# Altium PCB WX0.003.577PCB-4.1.PcbDoc
Units mm, origin at the board's own origin, x right, y up, seen from the top; angles counter-clockwise.
Board outline 120.3 x 240.26 mm, 2 copper layers (Top Layer, Bottom Layer), stack 0.325 mm thick; 29 components, 161 nets, 90 pads, 489 vias.
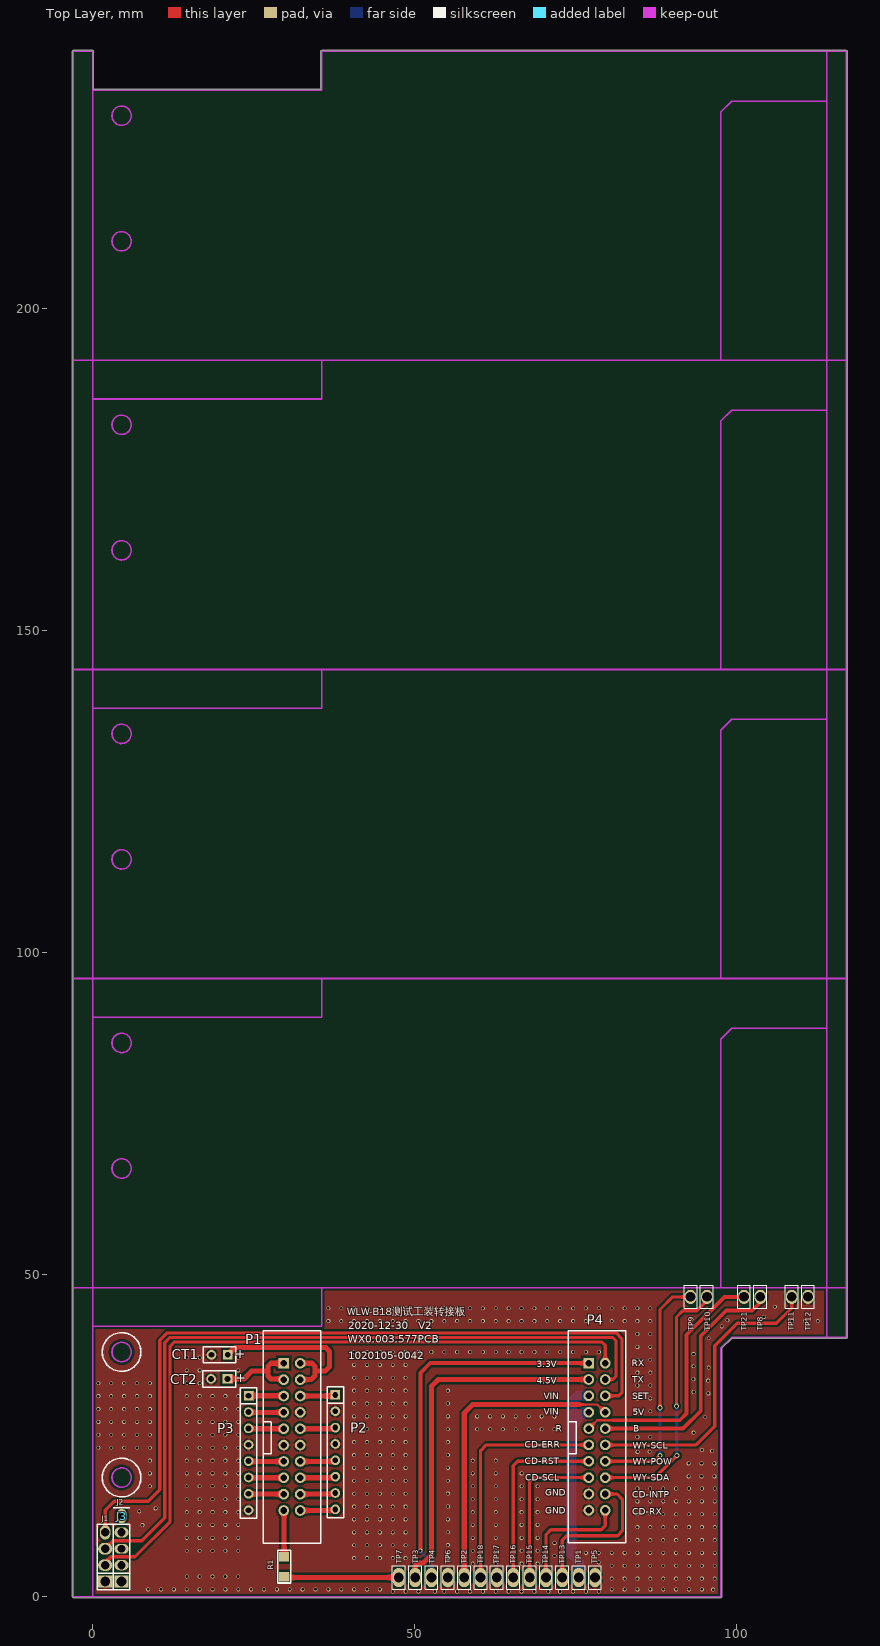
[diagram p0: Top Layer view]
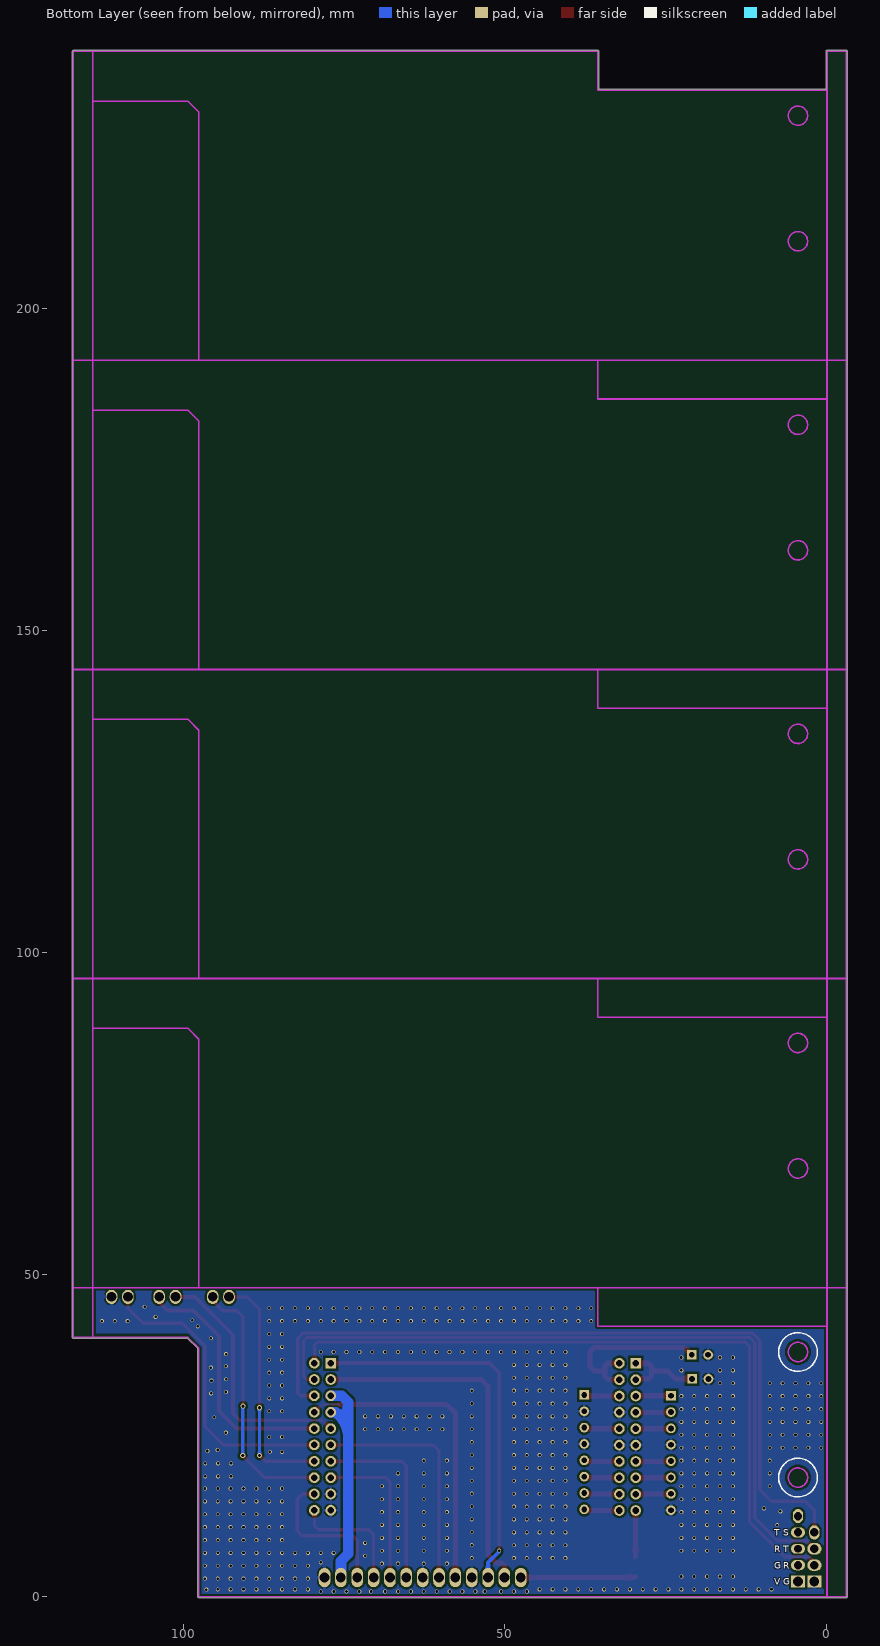
[diagram p1: Bottom Layer view, seen from below]

## Layer stack, top to bottom
Top Solder: solder mask 0.0102, Solder Resist, Dk 3.5
Top Layer: signal copper 0.0356
Dielectric 1: core 0.254, FR-4, Dk 4.2
Bottom Layer: signal copper 0.0356
Bottom Solder: solder mask 0.0102, Solder Resist, Dk 3.5

## Board outline
-3.127,0 ccw(c-3,0) -3,-0.127 97.511,-0.127 ccw(c97.511,0) 97.536,-0.125 ccw(c97.561,0) 97.689,0 97.689,38.53 99.291,40.132 117.043,40.132 ccw(c117.043,40.259) 117.171,40.259 117.171,240.002 ccw(c117.043,240.002) 117.043,240.129 114,240.129 35.585,240.129 ccw(c35.585,240.002) 35.458,240.002 35.458,234.129 0.127,234.129 0.127,240.002 ccw(c0,240.002) 0,240.129 -3,240.129 ccw(c-3,240.002) -3.127,240.002

## Design rules (kind name [scope] priority, off if disabled: settings)
Clearance VIA-VIA [ISVIA vs ISVIA] p1: gap=0.508 ignorepadtopadclearanceinfootprint=FALSE except(0: Arc-Hole Track-Hole SMDPad-Hole THPad-Hole Via-Hole Fill-Hole Poly-Hole Region-Hole Text-Hole)
Clearance VIA-PAD [ISVIA vs ISPAD] p2: gap=0.381 ignorepadtopadclearanceinfootprint=FALSE except(0: Arc-Hole Track-Hole SMDPad-Hole THPad-Hole Via-Hole Fill-Hole Poly-Hole Region-Hole Text-Hole)
Clearance VIA-TRACK [ISVIA vs ISTRACK] p3: gap=0.381 ignorepadtopadclearanceinfootprint=FALSE except(0: Arc-Hole Track-Hole SMDPad-Hole THPad-Hole Via-Hole Fill-Hole Poly-Hole Region-Hole Text-Hole)
Clearance Polygon [InPolygon] p4: gap=0.356 ignorepadtopadclearanceinfootprint=FALSE except(0: Arc-Hole Track-Hole SMDPad-Hole THPad-Hole Via-Hole Fill-Hole Poly-Hole Region-Hole Text-Hole)
Clearance [All] p5: gap=0.191 ignorepadtopadclearanceinfootprint=FALSE except(0: Arc-Hole Track-Hole SMDPad-Hole THPad-Hole Via-Hole Fill-Hole Poly-Hole Region-Hole Text-Hole)
ComponentClearance [All] p1 off: gap=0.254 collisioncheckmode=3 verticalgap=0.254 showdistances=FALSE
FabricationTestPointUsage TestPointUsage [All] p1: valid=0 allowmultiple=FALSE
FabricationTestpoint Testpoint [(IsPad And (OnTopLayer Or OnBottomLayer))] p1: side=3 testpointundercomponent=TRUE minsize=1.016 maxsize=2.54 preferedsize=1.524 minholesize=0 maxholesize=1.016 preferedholesize=0.813 testpointgrid=0.025 allowsidetop=TRUE allowsidebottom=TRUE usegrid=TRUE gridtolerance=0
HoleSize [All] p1: absolutevalues=TRUE maxlimit=12.7 minlimit=0 maxpercent=80.000 minpercent=20.000
HoleToHoleClearance [All] p1: gap=0 allowstackedmicrovias=TRUE
MinimumSolderMaskSliver [All] p1: minsoldermaskwidth=0
NetAntennae [All] p1 off: netantennaetolerance=0
PlaneConnect [InNet('GND')] p1: planeconnectstyle=Relief reliefexpansion=0.508 reliefentries=4 reliefconductorwidth=0.5 reliefairgap=0.254
PolygonConnect Polygon_Via [Isvia] p1: connectstyle=Direct reliefconductorwidth=0.254 reliefentries=4 polygonreliefangle="90 Angle" airgapwidth=0.254
PolygonConnect Polygon_GND [InNet('GND')] p2: connectstyle=Relief reliefconductorwidth=0.5 reliefentries=4 polygonreliefangle="90 Angle" airgapwidth=0.254
PolygonConnect Polygon_all [All] p3: connectstyle=Relief reliefconductorwidth=0.508 reliefentries=4 polygonreliefangle="90 Angle" airgapwidth=0.254
RoutingVias [All] p1: holewidth=0.305 width=0.508 viastyle="Through Hole" minholewidth=0.305 minwidth=0.508 maxholewidth=0.711 maxwidth=1.27
SilkToBoardRegionClearance [All] p1 off:
SilkToSilkClearance [All] p1: silktosilkclearance=0
SilkToSolderMaskClearance SilkscreenOverComponentPads [IsPad] p1: minsilkscreentomaskgap=0 clearancetoexposedcopper=TRUE
SolderMaskExpansion [All] p1: expansion=0.102
Width [All] p1: maxlimit=7.62 minlimit=0.203 preferedwidth=0.203
19 further rules are at their usual default settings.

## Classes and differential pairs
component class WLW-B18-MCU: 1.5 J1 J2 R62 TP9 TP10 TP11 TP12
component class WLW-B18-GPRS: TP1 TP3 TP4 TP5 TP6 TP7 TP8 TP13 TP14 TP15 TP21

## Components (designator, comment, footprint, x,y, rotation, side; value= is the part's Value field where it differs from the comment)
CT1 "BAT" BAT2 19.71,37.567 r180 top
CT2 "BAT" BAT2 19.66,33.833 r180 top
J1 "Header 4" HDR1X4#1 1.956,2.362 r90 top
J2 "HDR254M1X4" HDR1X4#2 4.496,2.362 r90 top
J3 "HDR254M1X4" HDR1X4#3 4.496,4.902 r90 top (schematic designator J2)
P1 "" PHD254_2X10P 30.963,24.816 r0 top
P2 "Header 8" HDR1X8 37.694,31.344 r270 top
P3 "Header 8" HDR1X8 24.232,31.217 r270 top
P4 "" PHD254_2X10P 78.334,24.841 r0 top
R1 "0R" R1206 29.743,4.674 r90 top
TP1 "Test Point" TP5#1 75.489,2.972 r0 top
TP2 "Test Point" TP5#1 57.709,2.972 r0 top
TP3 "Test Point" TP5#1 50.089,2.972 r0 top
TP4 "Test Point" TP5#1 52.629,2.972 r0 top
TP5 "Test Point" TP5#1 78.029,2.972 r0 top (schematic designator TP17)
TP6 "Test Point" TP5#1 55.169,2.972 r180 top (schematic designator TP24)
TP7 "Test Point" TP5#1 47.549,2.972 r0 top
TP8 "Test Point" TP5#2 103.708,46.558 r180 top
TP9 "Test Point" TP5#2 92.862,46.558 r180 top
TP10 "Test Point" TP5#2 95.402,46.558 r0 top
TP11 "Test Point" TP5#2 108.56,46.558 r0 top
TP12 "Test Point" TP5#2 111.1,46.558 r180 top (schematic designator TP23)
TP13 "Test Point" TP5#1 72.949,2.972 r180 top
TP14 "Test Point" TP5#1 70.409,2.972 r180 top
TP15 "Test Point" TP5#1 67.869,2.972 r180 top
TP16 "Test Point" TP5#1 65.329,2.972 r180 top
TP17 "Test Point" TP5#1 62.789,2.972 r0 top (schematic designator TP6)
TP18 "Test Point" TP5#1 60.249,2.972 r180 top
TP21 "Test Point" TP5#2 101.168,46.558 r0 top

## Footprints (in the part's own frame and the unit in brackets; to place one, negate y for a bottom-side part, rotate by r counter-clockwise, add the part's x,y. Pads: shape width x height; smd on the part's side, far side on the other; paste and mask are expansions set on the pad)
BAT2 [mm]
  rect 1.5x1.5 hole 0.9: 1(-1.282,0.001)
  round 1.5 hole 0.9: 2(1.258,0.001)
  silkscreen extent -2.55,-1.27 2.53,1.27
HDR1X4#1 [mm] "Connector; Header; 4 Position"
  rect 1.8x2.2 hole 1.5: 1(0,0)
  oval 1.8x2.2 hole 1.3: 2(2.54,0) 3(5.08,0)
  oval 2.2x1.6 hole 1.3: 4(7.62,0)
  silkscreen extent -1.27,-1.27 8.89,1.27, body extent -1.3,-1.3 8.86,1.24, height 8.54
HDR1X4#2 [mm] "Connector; Header; 4 Position"
  rect 1.8x2.2 hole 1.5: 1(0,0)
  oval 1.6x2.2 hole 1.3: 2(2.54,0) 4(7.62,0)
  oval 1.5x2.2 hole 1.2: 3(5.08,0)
  silkscreen extent -1.27,-1.27 8.89,1.27, body extent -1.3,-1.3 8.86,1.24, height 8.54
HDR1X4#3 [mm] "Connector; Header; 4 Position"
  oval 2.2x1.6 hole 1.3: 4(7.62,0)
  silkscreen extent 8.89,-1.27 8.89,1.27, body extent -1.3,-1.3 8.86,1.24, height 8.54
HDR1X8 [mm] "Connector; Header; 8 Position"
  rect 1.5x1.5 hole 0.9: 1(0,0)
  round 1.5 hole 0.9: 2(2.54,0) 3(5.08,0) 4(7.62,0) 5(10.16,0) 6(12.7,0) 7(15.24,0) 8(17.78,0)
  silkscreen extent -1.27,-1.27 19.05,1.27, body extent -1.27,-1.27 19.05,1.27, height 8.54
PHD254_2X10P [mil]
  rect 65x65 hole 40: 1(-50,450)
  round 65 hole 40: 2(50,450) 3(-50,350) 4(50,350) 5(-50,250) 6(50,250) 7(-50,150) 8(50,150) 9(-50,50) 10(50,50) 11(-50,-50) 12(50,-50) 13(-50,-150) 14(50,-150) 15(-50,-250) 16(50,-250) 17(-50,-350) 18(50,-350) 19(-50,-450) 20(50,-450)
  silkscreen extent -177,-650 177,650
R1206 [mil]
  rect 60x60 smd: 1(-62,0) 2(60.05,0)
  silkscreen extent -101,-40 100,40, body extent -102,-29 91,29, height 20
TP5#1 [mm]
  oval 1.8x3 hole 1.5: 1(0,0)
  silkscreen extent -1,-1.8 1,1.8
TP5#2 [mm]
  oval 1.8x2.2 hole 1.5: 1(0,0)
  silkscreen extent -1,-1.8 1,1.8

## Part data
CT1 CT2: "电池"
J1: "Header, 4-Pin"
P1 P4: library part "Header 10X2  PASS", "Header, 10-Pin, Dual row"
P2 P3: "Header, 8-Pin"
R1: library part RES
TP1 TP2 TP3 TP4 TP5 TP6 TP7 TP13 TP14 TP15 TP16 TP17 TP18: library part "Test Point  PASS", "测试点"
TP8 TP9 TP10 TP11 TP12 TP21: "测试点"

## Via types
v1: diameter 0.6, hole 0.4, Top Layer to Bottom Layer, tented both sides, 485 vias
v2: diameter 0.8, hole 0.5, Top Layer to Bottom Layer, tented both sides, 4 vias

## Nets (pads, with @x,y where several pads share a name; then routed paths per layer and width w, separated by ;. In a path a pad name is that pad's centre, name@x,y a point inside that pad or via, vN(x,y) a via of type N, cw(c..) or ccw(c..) an arc to the next point about the centre after c; other vN are vias at no path point)
3.3V: 
3.6V: 
4V: 
5V: 
5V1: P4.8 TP2.1 | length 48.5
  Top Layer w0.3: 75.565,29.845 78.41,29.845 P4.8
  Top Layer w0.8: TP2.1 57.709,28.524 59.03,29.845 75.565,29.845
5V2: P4.3 TP3.1 | length 56.1
  Top Layer w0.8: TP3.1 50.089,4.826 50.495,5.232 51.359,5.232 52.629,6.502 52.629,32.69 53.67,33.731 P4.3
119: 
ADC_CTL: 
B: P4.10 TP8.1 | length 39.9
  Top Layer w0.6: P4.10 91.694,26.111 94.437,28.854 94.437,40.488 98.4,44.45 102.438,44.45 103.708,45.72 TP8.1
BUZZ: 
CARD_CHK_INTP4: P4.18 TP13.1 | length 23.7
  Top Layer w0.5: TP13.1 72.949,8.788 73.635,9.474 81.534,9.474 82.271,10.211 82.271,15.138 81.458,15.951 P4.18
CARD_ERR: P4.11 TP18.1 | length 36.9
  Top Layer w0.5: TP18.1 60.249,22.657 61.163,23.571 P4.11
CARD_POW: 
CARD_RST: P4.13 TP16.1 | length 29.4
  Top Layer w0.5: TP16.1 65.329,20.345 66.015,21.031 P4.13
CARD_SCL: P4.15 TP15.1 | length 24.3
  Top Layer w0.5: TP15.1 67.869,17.856 68.504,18.491 P4.15
CARD_SDA_RXD3: P4.20 TP14.1 | length 18.8
  Top Layer w0.5: TP14.1 70.409,9.652 71.171,10.414 78.969,10.414 79.604,11.049 P4.20
CLOSE: 
COM0: 
COM1: 
COM2: 
COM3: 
ESAM_CLK: 
ESAM_POW: 
ESAM_RST: 
FLASH_CLK: 
FLASH_CS: 
FLASH_CTL: 
FLASH_MISO: 
FLASH_MOSI: 
FLASH_POWER: 
FLASH_WP: 
GD_PWR: 
GND: CT1.2 CT2.2 J1.1 P1.8 P1.11 P1.12 P2.2 P2.4 P3.4 P3.8 P4.17 P4.19 TP5.1 TP6.1 TP12.1 TP17.1
  other v1: 46.609,0.813 48.609,0.813 50.609,0.813 53.162,0.813 54.609,0.813 56.609,0.813 58.609,0.813 60.609,0.813 62.609,0.813 64.609,0.813 66.609,0.813 68.609,0.813 70.79,0.813 72.609,0.813 74.609,0.813 76.609,0.813 78.609,0.813 96.368,1.092 8.615,1.143 10.615,1.143 12.615,1.143 14.615,1.143 16.615,1.143 16.615,1.143 18.615,1.143 20.615,1.143 22.615,1.143 24.615,1.143 26.615,1.143 28.615,1.143 30.615,1.143 32.615,1.143 34.615,1.143 36.615,1.143 38.615,1.143 40.615,1.143 42.615,1.143 44.615,1.143 80.615,1.143 82.615,1.143 84.615,1.143 86.615,1.143 88.615,1.143 90.615,1.143 92.615,1.143 94.615,1.143 80.612,2.799 82.612,2.799 84.612,2.799 86.612,2.799 88.612,2.799 90.612,2.799 92.612,2.799 94.612,2.799 96.612,2.799 14.615,3.143 16.615,3.143 18.615,3.143 20.615,3.143 22.615,3.143 80.612,4.799 82.612,4.799 84.612,4.799 86.612,4.799 88.612,4.799 90.612,4.799 92.612,4.799 94.612,4.799 96.612,4.799 59.03,5.143 62.615,5.143 66.615,5.143 69.113,5.143 78.613,5.334 40.615,5.998 42.615,5.998 44.615,5.998 46.615,5.998 48.615,5.998 55.169,6.004 71.73,6.357 76.612,6.799 78.612,6.799 80.612,6.799 82.612,6.799 84.612,6.799 86.612,6.799 88.612,6.799 90.612,6.799 92.612,6.799 94.612,6.799 96.612,6.799 14.615,7.143 16.615,7.143 18.615,7.143 20.615,7.143 22.615,7.143 59.03,7.143 62.615,7.143 66.615,7.143 69.113,7.143 40.615,7.998 42.615,7.998 44.615,7.998 46.615,7.998 48.615,7.998 55.169,8.004 71.73,8.357 84.612,8.799 86.612,8.799 88.612,8.799 90.612,8.799 92.612,8.799 94.612,8.799 96.612,8.799 14.615,9.143 16.615,9.143 18.615,9.143 20.615,9.143 22.615,9.143 59.03,9.143 62.615,9.143 66.615,9.143 69.113,9.143 40.615,9.998 42.615,9.998 44.615,9.998 46.615,9.998 48.615,9.998 55.169,10.004 84.612,10.799 86.612,10.799 88.612,10.799 90.612,10.799 92.612,10.799 94.612,10.799 96.612,10.799 7.722,11.125 14.615,11.143 16.615,11.143 18.615,11.143 20.615,11.143 22.615,11.143 59.03,11.143 62.615,11.143 66.615,11.143 69.113,11.143 40.615,11.998 42.615,11.998 44.615,11.998 46.615,11.998 48.615,11.998 55.169,12.004 84.612,12.799 86.612,12.799 88.612,12.799 90.612,12.799 92.612,12.799 94.612,12.799 96.612,12.799 14.615,13.143 16.615,13.143 18.615,13.143 20.615,13.143 22.615,13.143 59.03,13.143 62.615,13.143 66.615,13.143 69.113,13.143 7.239,13.259 9.779,13.716 40.615,13.998 42.615,13.998 44.615,13.998 46.615,13.998 48.615,13.998 55.169,14.004 84.612,14.799 86.612,14.799 88.612,14.799 90.612,14.799 92.612,14.799 94.612,14.799 96.612,14.799 14.615,15.143 16.615,15.143 18.615,15.143 20.615,15.143 22.615,15.143 59.03,15.143 62.615,15.143 66.615,15.143 69.113,15.143 40.615,15.998 42.615,15.998 44.615,15.998 46.615,15.998 48.615,15.998 55.169,16.004 84.612,16.799 86.612,16.799 88.612,16.799 90.612,16.799 92.612,16.799 94.612,16.799 96.612,16.799 8.89,17.143 14.615,17.143 16.615,17.143 18.615,17.143 20.615,17.143 22.615,17.143 59.03,17.143 62.615,17.143 66.615,17.143 69.113,17.143 40.615,17.998 42.615,17.998 44.615,17.998 46.615,17.998 48.615,17.998 55.169,18.004 92.558,18.694 94.558,18.694 96.558,18.694 8.89,19.143 14.615,19.143 16.615,19.143 18.615,19.143 20.615,19.143 22.615,19.143 59.03,19.143 62.615,19.143 66.615,19.143 40.615,19.998 42.615,19.998 44.615,19.998 46.615,19.998 48.615,19.998 55.169,20.004 92.558,20.694 94.558,20.694 96.558,20.694 8.89,21.143 14.615,21.143 16.615,21.143 18.615,21.143 20.615,21.143 22.615,21.143 59.03,21.143 62.615,21.143 40.615,21.998 42.615,21.998 44.615,21.998 46.615,21.998 48.615,21.998 55.169,22.004 84.633,22.479 86.512,22.504 96.215,22.631 94.64,22.784 0.89,23.143 2.89,23.143 4.89,23.143 6.89,23.143 8.89,23.143 14.615,23.143 16.615,23.143 18.615,23.143 20.615,23.143 22.615,23.143 40.615,23.998 42.615,23.998 44.615,23.998 46.615,23.998 48.615,23.998 55.169,24.004 84.612,24.799 86.612,24.799 0.89,25.143 2.89,25.143 4.89,25.143 6.89,25.143 8.89,25.143 14.615,25.143 16.615,25.143 18.615,25.143 20.615,25.143 22.615,25.143 93.345,25.476 40.615,25.998 42.615,25.998 44.615,25.998 46.615,25.998 48.615,25.998 55.169,26.004 59.723,26.01 61.723,26.01 63.723,26.01 65.723,26.01 67.723,26.01 69.723,26.01 71.723,26.01 0.89,27.143 2.89,27.143 4.89,27.143 6.89,27.143 8.89,27.143 14.615,27.143 16.615,27.143 18.615,27.143 20.615,27.143 22.615,27.143 95.148,27.864 40.615,27.998 42.615,27.998 44.615,27.998 46.615,27.998 48.615,27.998 55.169,28.004 59.723,28.01 61.723,28.01 63.723,28.01 65.723,28.01 67.723,28.01 69.723,28.01 71.723,28.01 84.612,28.799 86.612,28.799 0.89,29.143 2.89,29.143 4.89,29.143 6.89,29.143 8.89,29.143 14.615,29.143 16.615,29.143 18.615,29.143 20.615,29.143 22.615,29.143 40.615,29.998 42.615,29.998 44.615,29.998 46.615,29.998 48.615,29.998 55.169,30.004 84.612,30.799 86.612,30.799 0.89,31.143 2.89,31.143 4.89,31.143 6.89,31.143 8.89,31.143 14.615,31.143 16.615,31.143 18.615,31.143 20.615,31.143 22.615,31.143 95.631,31.572 93.345,31.789 40.615,31.998 42.615,31.998 44.615,31.998 46.615,31.998 48.615,31.998 55.169,32.004 84.612,32.799 86.612,32.799 0.89,33.143 2.89,33.143 4.89,33.143 6.89,33.143 8.89,33.143 14.615,33.143 16.615,33.143 95.58,33.553 93.311,33.761 40.615,33.998 42.615,33.998 44.615,33.998 46.615,33.998 48.615,33.998 84.612,34.799 86.612,34.799 14.615,35.143 16.615,35.143 22.615,35.143 95.682,35.585 93.345,35.789 40.615,35.998 42.615,35.998 44.615,35.998 46.615,35.998 48.615,35.998 84.612,36.799 86.612,36.799 14.615,37.143 16.615,37.143 22.615,37.143 93.32,37.668 40.615,37.998 42.615,37.998 42.615,37.998 44.615,37.998 46.615,37.998 48.615,37.998 50.615,37.998 52.615,37.998 54.615,37.998 56.615,37.998 58.615,37.998 60.615,37.998 62.615,37.998 64.615,37.998 66.615,37.998 68.615,37.998 70.615,37.998 72.615,37.998 74.615,37.998 76.615,37.998 78.615,37.998 84.612,38.799 86.612,38.799 95.682,40.132 84.612,40.799 86.612,40.799 97.714,41.986 36.612,42.799 38.612,42.799 40.612,42.799 42.612,42.799 44.612,42.799 46.612,42.799 48.612,42.799 50.612,42.799 52.612,42.799 54.612,42.799 56.612,42.799 58.612,42.799 60.612,42.799 62.612,42.799 64.612,42.799 66.612,42.799 68.612,42.799 70.612,42.799 72.612,42.799 74.612,42.799 76.612,42.799 78.612,42.799 80.612,42.799 82.612,42.799 84.612,42.799 86.612,42.799 108.612,42.799 110.612,42.799 112.612,42.799 98.577,42.926 104.267,43.459 36.612,44.799 38.612,44.799 40.612,44.799 42.612,44.799 44.612,44.799 46.612,44.799 48.612,44.799 50.612,44.799 52.612,44.799 54.612,44.799 56.612,44.799 58.612,44.799 60.612,44.799 62.612,44.799 64.612,44.799 66.612,44.799 68.612,44.799 70.612,44.799 72.612,44.799 74.612,44.799 76.612,44.799 78.612,44.799 80.612,44.799 82.612,44.799 84.612,44.799 86.612,44.799 105.969,45.034
GPRS_POWER: 
GPRS_PWRKEY: 
HALL1_INTP6: 
HALL1_PWR: CT1.1 P1.2 P1.4 | length 28
  Top Layer w0.8: CT1.1 22.137,38.71 36.195,38.71 36.805,38.1 36.805,35.712 36.144,35.052 34.519,35.052 ; P1.4 33.909,33.706 34.519,34.315 34.519,35.052 ; P1.2 34.061,36.246 34.519,35.789 34.519,35.052
HALL2_INTP7: 
HALL2_PWR: CT2.1 P1.1 P1.3 | length 13.6
  Top Layer w0.8: CT2.1 23.494,33.831 24.714,35.052 27.254,35.052 ; P1.3 29.567,33.831 27.686,33.831 27.254,34.263 27.254,35.052 ; P1.1 27.711,36.246 27.254,35.789 27.254,35.052
IRDA_CTL: 
IRDA_POW: 
IRDA_RXD2: 
IRDA_TXD2: 
KEY_INTP0: 
LED: 
LV1: 
LV2: 
M_POWER: 
NC1: 
NC2: 
NetB1_1: 
NetB1_2: 
NetC1_1: 
NetC2_1: 
NetC7_2: 
NetC8_2: 
NetC13_1: 
NetC32_1: 
NetC38_2: 
NetC41_2: 
NetD1_2: 
NetD4_1: 
NetD5_2: 
NetD6_1: 
NetD10_2: 
NetJ1_2: 
NetJ1_3: 
NetJ1_4: 
NetP1_5: P1.5 P3.1 | length 5.5
  Top Layer w0.8: P3.1 29.642,31.217 P1.5
NetP1_6: P1.6 P2.1 | length 5.5
  Top Layer w0.8: P1.6 37.516,31.166 P2.1
NetP1_7: P1.7 P3.2 | length 5.5
  Top Layer w0.8: P3.2 24.282,28.626 P1.7
NetP1_9: P1.9 P3.3 | length 5.5
  Top Layer w0.8: P3.3 24.282,26.086 P1.9
NetP1_10: P1.10 P2.3 | length 5.5
  Top Layer w0.8: P1.10 37.516,26.086 P2.3
NetP1_13: P1.13 P3.5 | length 5.5
  Top Layer w0.8: P3.5 24.282,21.006 P1.13
NetP1_14: P1.14 P2.5 | length 5.5
  Top Layer w0.8: P1.14 37.516,21.006 P2.5
NetP1_15: P1.15 P3.6 | length 5.5
  Top Layer w0.8: P3.6 24.282,18.466 P1.15
NetP1_16: P1.16 P2.6 | length 5.5
  Top Layer w0.8: P1.16 37.516,18.466 P2.6
NetP1_17: P1.17 P3.7 | length 5.5
  Top Layer w0.8: P3.7 24.282,15.926 P1.17
NetP1_18: P1.18 P2.7 | length 5.5
  Top Layer w0.8: P1.18 37.516,15.926 P2.7
NetP1_19: P1.19 R1.2 | length 7.2
  Top Layer w0.8: P1.19 29.743,13.335 R1.2
NetP1_20: P1.20 P2.8 | length 5.5
  Top Layer w0.8: P1.20 37.516,13.386 P2.8
NetP9_1: 
NetP10_1: 
NetQ1_B: 
NetQ1_C: 
NetQ2_B: 
NetQ3_B: 
NetQ3_C: 
NetQ4_G: 
NetQ5_B: 
NetQ5_C: 
NetQ6_B: 
NetQ6_C: 
NetQ7_B: 
NetQ8_B: 
NetQ9_B: 
NetQ9_E: 
NetQ11_B: 
NetQ12_B: 
NetQ13_B: 
NetQ13_C: 
NetQ14_B: 
NetR1_1: R1.1 TP7.1 | length 17.9
  Top Layer w0.8: R1.1 29.87,2.972 TP7.1
NetR1_2: 
NetR4_2: 
NetR5_1: 
NetR6_1: 
NetR7_2: 
NetR15_1: 
NetR50_1: 
OPEN: 
PWRKEY: 
R: P4.9 TP21.1 | length 39.7
  Top Layer w0.35: P4.9 78.359,27.407 80.823,27.407
  Top Layer w0.6: 80.823,27.407 91.186,27.407 92.253,28.473 92.253,40.691 98.12,46.558 TP21.1
R1: 
RST: J2.3
RTC: P4.1 TP4.1 | length 59.3
  Top Layer w0.6: v1(50.902,7.163) 50.902,34.747 52.426,36.271 P4.1
  Bottom Layer w0.6: v1(50.902,7.163) 50.902,7.01 52.629,5.283 TP4.1
RXD0: 
RXD1: J1.2 P4.2 | length 111.2
  Top Layer w0.5: J1.2 1.956,5.309 2.845,6.198 6.579,6.198 12.04,11.659 12.04,38.925 12.675,39.56 79.084,39.56 79.604,39.04 P4.2
S0: 
S1: 
S2: 
S3: 
S4: 
S5: 
S6: 
S7: 
S8: 
S9: 
S10: 
S11: 
S12: 
S13: 
S14: 
S15: 
S16: 
S17: 
S18: 
S19: 
S20: 
SET: J1.4 P4.6 | length 120.2
  Top Layer w0.5: J1.4 1.956,13.437 3.353,14.834 8.636,14.834 10.439,16.637 10.439,39.802 11.597,40.96 81.316,40.96 82.194,40.081 82.194,31.648 81.737,31.191 P4.6
SIM_CLK: 
SIM_DATA: 
SIM_RST: 
SLEEP: 
TIANXIAN: 
TOOL0: J2.4
TXD0: 
TXD1: J1.3 P4.4 | length 116.5
  Top Layer w0.5: J1.3 3.206,8.692 7.651,8.692 11.201,12.243 11.201,39.471 11.99,40.26 80.771,40.26 81.28,39.751 81.28,34.214 80.797,33.731 P4.4
TXD3: 
USIM_GND: 
USIM_VDD: 
VI: P4.5 P4.7 TP1.1 | length 34.4
  Bottom Layer w1.6: TP1.1 75.489,5.512 74.346,6.655 74.346,26.721 ; P4.7 76.276,28.651 74.346,26.721 ; P4.5 75.311,31.191 74.346,30.226 74.346,26.721
VIN: 
VIN_ADC: 
WY_POW: P4.14 TP9.1 | length 37.1
  Top Layer w0.5: P4.14 87.224,21.031 v2@88.113,21.92 ; v2(88.113,29.337) 88.113,44.602 90.068,46.558 TP9.1
  Bottom Layer w0.5: v2(88.113,21.946) v2(88.113,29.337)
WY_SCL: P4.12 TP11.1 | length 46.8
  Top Layer w0.5: P4.12 93.726,23.571 96.622,26.467 96.622,38.989 100.101,42.469 106.197,42.469 108.56,44.831 TP11.1
WY_SDA: P4.16 TP10.1 | length 41.2
  Top Layer w0.5: P4.16 87.3,18.491 v2(90.729,21.92) ; v2(90.678,29.591) 90.678,43.434 91.644,44.4 93.813,44.4 95.971,46.558 TP10.1
  Bottom Layer w0.5: v2(90.678,29.591) 90.729,29.54 v2(90.729,21.92)
X1: 
X2: 
XT1: 
XT2: 
pads on no net: J2.1 J2.2 J3.4

## Polygon pours and split planes (outlines as drawn)
GND on Bottom Layer "Mid-Layer 2-No Net" (solid, remove dead copper, pour order 4): 0,48 0.001,48 114,48 114,0 0,0 0,48
GND on Top Layer "Mid-Layer 2-No Net" (solid, remove dead copper, pour order 6): 0.236,47.789 0.237,47.789 114.237,47.789 114.237,-0.211 0.236,-0.211 0.236,47.789 0.237,47.789

## Keep-outs
Keep-Out Layer:
  circle w0.254: c4.5,210.502 r1.5
  circle w0.254: c4.5,230.002 r1.5
  circle w0.254: c4.5,162.502 r1.5
  circle w0.254: c4.5,182.002 r1.5
  circle w0.254: c4.5,114.501 r1.5
  circle w0.254: c4.5,134.001 r1.5
  circle w0.254: c4.5,66.501 r1.5
  circle w0.254: c4.5,86.001 r1.5
  circle w0.254: c4.5,38 r1.5
  circle w0.254: c4.5,18.5 r1.5
  lines w0.254: -3,48 0,48 ; -3,96.001 0,96.001 ; -3,192.002 0,192.002 ; -2.997,144.001 0,144.001 ; -1.598,240.002 -3,240.002 ; 97.511,0 0,0 ; 97.511,48 0,48 ; 97.511,96.001 0,96.001 ; 97.511,144.001 0,144.001 ; 97.511,192.002 0,192.002 ; 97.561,0 97.561,38.583 99.238,40.259 114,40.259 ; 97.561,48 97.561,86.583 99.238,88.259 114,88.259 114,96 ; 97.561,96.001 97.561,134.583 99.238,136.26 114,136.26 114,144 ; 97.561,144.001 97.561,182.584 99.238,184.26 114,184.26 114,192.001 ; 97.561,192.002 97.561,230.584 99.238,232.261 114,232.261 ; 114,240.001 114,232.261 ; 115.6,240.002 117.043,240.002 117.043,40.259 114,40.259 ; 117,240.002 114,240.002 35.585,240.002 35.585,234.002 0,234.002 ; 117.043,48 114,48 ; 117.043,96 114,96 ; 117.043,144.001 114,144.001 35.585,144.001 ; 117.043,192.001 114,192.001 ; -3,240.002 0,240.002 0,239.423 0,234.002 ; -3,240.002 -3,143.152 -3,0 0,0 ; 0,0 0,42 ; 0,42 0,47.422 0,48 ; 0,42 35.585,42 35.585,48 ; 0,48 0,90 ; 0,48 35.585,48 ; 0,90 35.585,90 35.585,96.001 ; 0,90 0,95.422 0,96.001 ; 0,96.001 0,138.001 ; 0,96.001 35.585,96.001 ; 0,138.001 35.585,138.001 35.585,144.001 ; 0,138.001 0,143.423 0,144.001 ; 0,144.001 0,186.001 ; 0,144.001 35.585,144.001 ; 0,186.001 35.585,186.001 35.585,192.002 ; 0,186.001 0,191.423 0,192.002 ; 0,192.002 0,234.002 ; 0,192.002 35.585,192.002 ; 35.585,48 114,48 ; 35.585,96.001 114,96 ; 35.585,192.002 114,192.001 ; 114,40.259 114,48 ; 114,48 114,232.261

## Silkscreen, mask and mechanical layers (free items; w line width, h text height)
Top Overlay:
  circle w0.254: c4.5,18.5 r3
  circle w0.254: c4.5,38 r3
  text "WLW-B18测试工装转接板" at 39.546,43.307 h2
  text "V2" at 50.571,41.148 h2
  text "2020-12-30" at 39.726,41.123 h2
  text "WX0.003.577PCB" at 39.649,39.014 h2
  text "1020105-0042" at 39.726,36.474 h2
  text "RX" at 83.744,35.763 h1
  text "3.3V" at 69.012,35.662 h1
  text "TX" at 83.795,33.223 h1
  text "4.5V" at 68.986,33.071 h1
  text "SET" at 83.795,30.658 h1
  text "VIN" at 70.028,30.632 h1
  text "VIN" at 70.028,28.219 h1
  text "5V" at 83.922,28.143 h1
  text "R" at 71.958,25.654 h1
  text "B" at 83.947,25.629 h1
  text "CD-ERR" at 67.132,23.139 h1
  text "WY-SCL" at 83.922,22.962 h1
  text "CD-RST" at 67.132,20.549 h1
  text "WY-POW" at 83.871,20.523 h1
  text "WY-SDA" at 83.896,18.009 h1
  text "CD-SCL" at 67.208,17.983 h1
  text "GND" at 70.307,15.672 h1
  text "CD-INTP" at 83.795,15.392 h1
  text "GND" at 70.307,12.903 h1
  text "CD-RX" at 83.82,12.751 h1
Bottom Overlay:
  circle w0.254: c4.5,38 r3
  circle w0.254: c4.5,18.5 r3
  text "S" at 6.754,9.435 h1
  text "T" at 8.151,9.435 h1
  text "T" at 6.754,6.9 h1
  text "R" at 8.151,6.9 h1
  text "R" at 6.754,4.364 h1
  text "G" at 8.151,4.364 h1
  text "G" at 6.754,1.829 h1
  text "V" at 8.151,1.829 h1

## Text inside footprints (layer, text, board x,y; h text height)
CT1: Top Overlay "+" at 23.774,38.278 h1.5 r180
CT2: Top Overlay "+" at 23.851,34.519 h1.5 r180